# EAGLE board oao-001 (EAGLE 8.6.3)
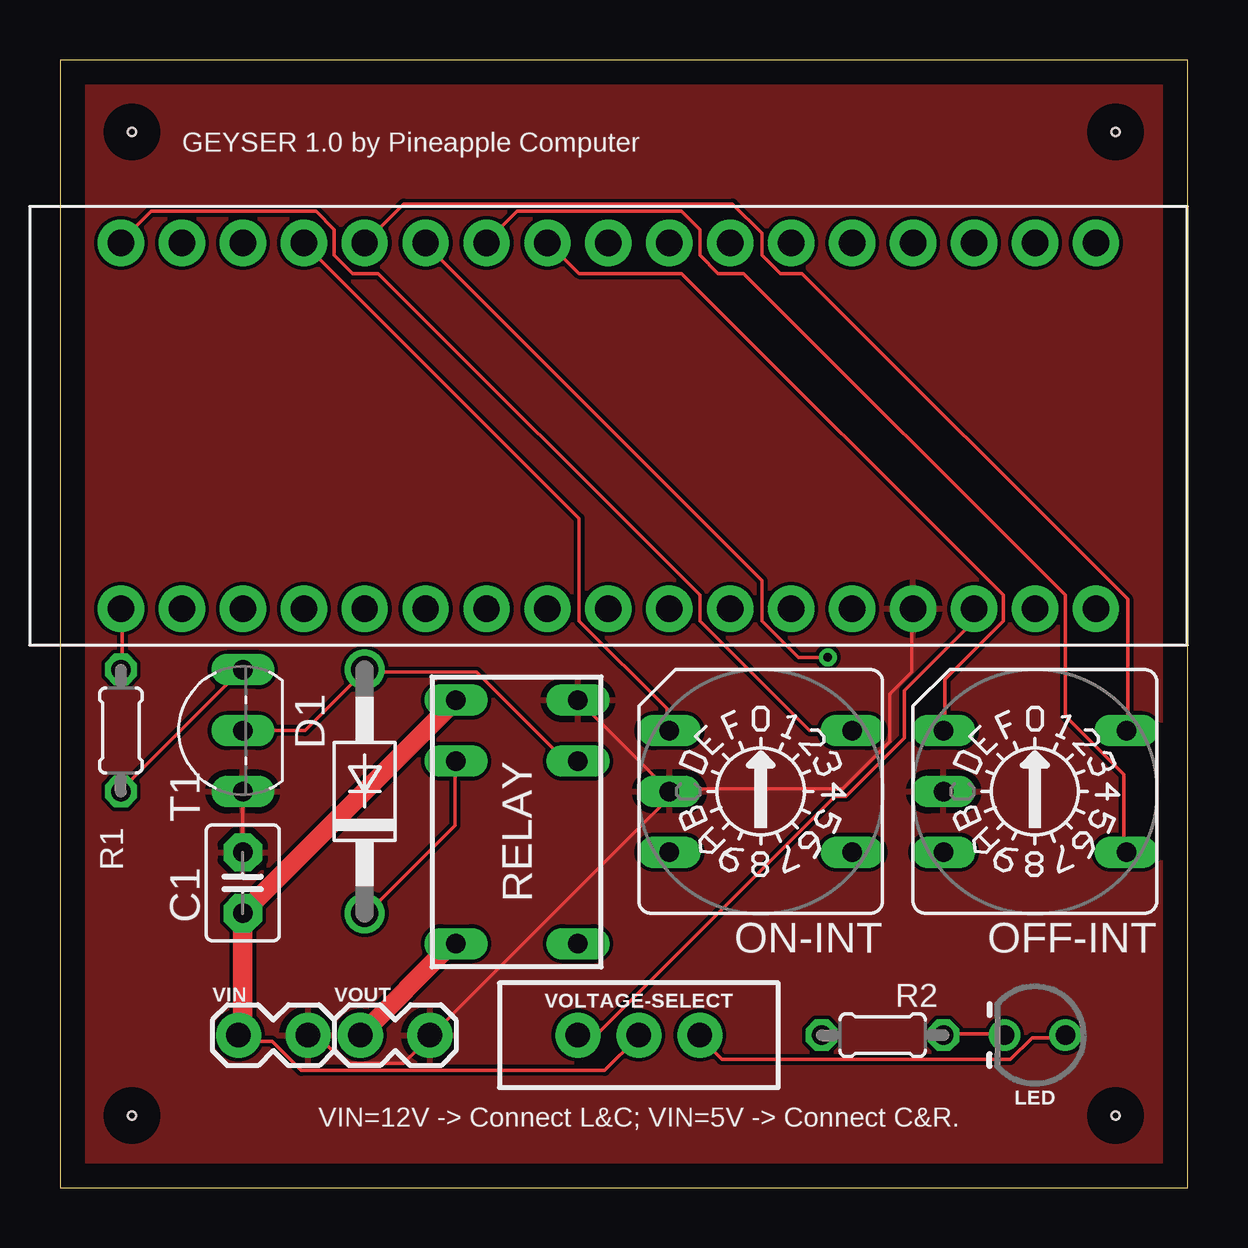
[diagram p0: board, top side]
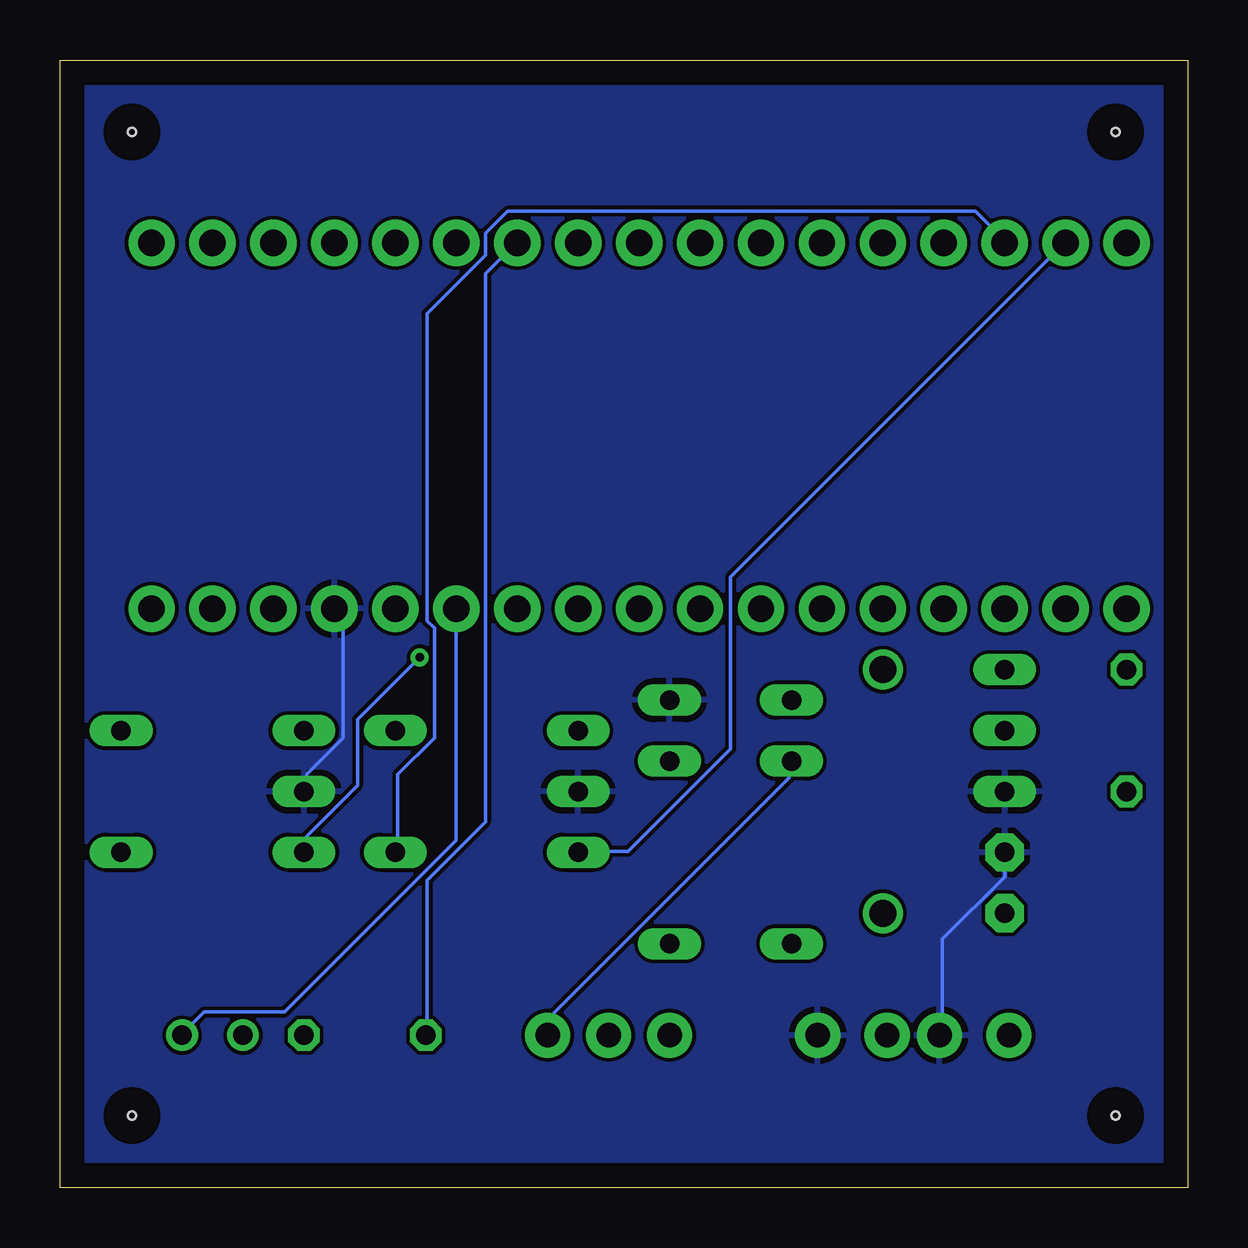
[diagram p1: board, bottom side, seen from below]

Size 47 x 47 mm. Coordinates in mm from the lower left corner, seen from the top.
Outline: 0,0 47,0 47,47 0,47 0,0
Copper layers (1*16): Top 0.035mm / dielectric 1.5mm / Bottom 0.035mm
Design rules "default": minimum track width 6mil, minimum drill 0.35mm, track to track 6mil, track to pad 6mil, pad to pad 6mil, via to via 6mil, smd to smd 6mil, copper to edge 40mil, drill to drill 6mil, minimum pad ring 10mil, minimum via ring 8mil, stop-mask expansion 4mil, vias tented up to drill 0mil, thermal gap 10mil
Holes 0.32 mm at 3,3 44,3 3,44 44,44

## Footprints (pad centres in the part's own frame; a part is rotated, then mirrored left to right if it is on the bottom)
C2.5-3 = drill 0.813 pad 1.6 octagon: 1 -1.27,0; 2 1.27,0
DO41-10 = drill 1.118: A 5.08,0; C -5.08,0
LED_3MM-NS = drill 0.813: A -1.27,0; K 1.27,0
A1353HEX = drill 0.813 long: 1 3.81,-2.54; 2 -3.81,2.54; 4 3.81,2.54; 8 -3.81,-2.54; C 3.81,0
0204/5 = drill 0.813 octagon: 1 -2.54,0; 2 2.54,0
G5V1 = drill 0.813 long: 1 -5.08,-2.54; 2 -2.54,-2.54; 5 5.08,-2.54; 6 5.08,2.54; 9 -2.54,2.54; 10 -5.08,2.54
TO92-ECB = drill 0.813 long: B 2.54,0; C 0,0; E -2.54,0
ARDUINOMICRO = drill 1.1 pad 1.93: P$1 -20.32,7.62; P$2 -17.78,7.62; P$3 -15.24,7.62; P$4 -12.7,7.62; P$5 -10.16,7.62; P$6 -7.62,7.62; P$7 -5.08,7.62; P$8 -2.54,7.62; P$9 0,7.62; P$10 2.54,7.62; P$11 5.08,7.62; P$12 12.7,-7.62; P$13 10.16,-7.62; P$14 12.7,7.62; P$15 15.24,7.62; P$16 17.78,7.62; P$17 20.32,7.62; P$18 20.32,-7.62; P$19 17.78,-7.62; P$20 15.24,-7.62; P$21 7.62,7.62; P$22 10.16,7.62; P$23 7.62,-7.62; P$24 5.08,-7.62; P$25 2.54,-7.62; P$26 0,-7.62; P$27 -2.54,-7.62; P$28 -5.08,-7.62; P$29 -7.62,-7.62; P$30 -10.16,-7.62; P$31 -12.7,-7.62; P$32 -15.24,-7.62; P$33 -17.78,-7.62; P$34 -20.32,-7.62
1X02_LOCK = drill 1.016 pad 1.88: 1 -0.178,0; 2 2.718,0
SWITCH_SPDT_PTH_11.6X4.0MM = drill 1.016 pad 1.88: 1 0,2.54; 2 0,0; 3 0,-2.54

## Placement (x,y rotation side)
C1  [C2.5-3]  7.62,12.7 90 top
D1  1N4004  [DO41-10]  12.7,16.51 90 top
LED  [LED_3MM-NS]  40.64,6.35 180 top
OFF-INT  [A1353HEX]  40.64,16.51 180 top
ON-INT  [A1353HEX]  29.21,16.51 180 top
R1  3.3k  [0204/5]  2.54,19.05 90 top
R2  220  [0204/5]  34.29,6.35 0 top
RELAY  G5V1  [G5V1]  19.05,15.24 270 top
T1  2SC1815  [TO92-ECB]  7.62,19.05 90 top
U$1  ARDUINOMICRO  [ARDUINOMICRO]  22.86,31.75 0 top
VIN  [1X02_LOCK]  7.62,6.35 0 top
VOLTAGE-SELECT  12V-5V  [SWITCH_SPDT_PTH_11.6X4.0MM]  24.13,6.35 270 top
VOUT  [1X02_LOCK]  12.7,6.35 0 top

## Library data of the parts
C1 = capacitor-wima
D1 = diode
LED = SparkFun-LED
OFF-INT ON-INT = switch-dil; OC_FARNELL: unknown; OC_NEWARK: unknown
R1 R2 = resistor
RELAY = relay; MPN: G5V-1-DC24; OC_FARNELL: 9949593; OC_NEWARK: 36M6377
T1 = transistor
U$1 = adafruit
VIN VOUT = SparkFun-Connectors
VOLTAGE-SELECT = SparkFun-Switches; PROD_ID: SWCH-08261; SF_SKU: COM-00102

## Nets
GND: C1.2 OFF-INT.C ON-INT.C RELAY.10 T1.E U$1.P$12 VIN.2 VOUT.2
LEDDRIVE: R2.1 U$1.P$11
N$1: RELAY.5 VOUT.1
N$2: OFF-INT.8 U$1.P$5
N$3: R1.1 T1.B
N$4: D1.A RELAY.9 T1.C
N$5: OFF-INT.4 U$1.P$6
N$6: OFF-INT.2 U$1.P$7
N$7: ON-INT.8 U$1.P$1
N$8: ON-INT.4 U$1.P$2
N$9: ON-INT.2 U$1.P$3
N$10: ON-INT.1 U$1.P$4
N$11: OFF-INT.1 U$1.P$8
N$14: LED.K R2.2
RELAYDRIVE: R1.2 U$1.P$34
V12: U$1.P$20 VOLTAGE-SELECT.3
VCC: D1.C LED.A RELAY.2 U$1.P$23 VOLTAGE-SELECT.1
VDD: C1.1 RELAY.1 VIN.1 VOLTAGE-SELECT.2

## Tracks (layer width: path | path; a pad name or v marks a point on that pad's centre or on a via)
GND
  Top 0.152: ON-INT.C RELAY.10 | C1.2 T1.E | VIN.2 10.36,6.25 10.82,6.25 11.89,5.18 14.33,5.18 15.39,6.25 VOUT.2 15.54,6.4 25.3,16.15 25.3,16.46 ON-INT.C | U$1.P$12 35.51,24.08 35.51,21.49 34.59,20.57 34.59,18.59 32.61,16.61 25.45,16.61 ON-INT.C
  Bottom 0.152: U$1.P$12 35.2,23.77 35.2,18.75 36.73,17.22 36.73,16.61 OFF-INT.C | C1.2 7.62,12.95 10.21,10.36 10.21,6.4 VIN.2
  pour Bottom: 0,0 46.99,0 46.99,46.99 0,46.99
  pour Top: 0,0 46.99,0 46.99,46.99 0,46.99
LEDDRIVE
  Bottom 0.152: R2.1 31.7,6.4 31.7,12.8 29.26,15.24 29.26,38.1 28.04,39.32 U$1.P$11
N$1
  Top 0.813: RELAY.5 16.33,10.16 VOUT.1
N$2
  Top 0.152: U$1.P$5 14.33,41 28.04,41 29.26,39.78 29.26,38.86 30.02,38.1 30.94,38.1 44.5,24.54 44.5,19.05 OFF-INT.8
N$3
  Top 0.152: R1.1 2.59,16.61 7.62,21.64 T1.B
N$4
  Top 0.152: RELAY.9 21.49,17.83 21.03,17.83 17.37,21.49 12.8,21.49 D1.A 12.65,21.49 10.21,19.05 T1.C
N$5  (via drill 0.35)
  Top 0.152: v32,22.1 30.79,22.1 29.26,23.62 29.26,25.3 15.24,39.32 U$1.P$6
  Bottom 0.152: v32,22.1 34.59,19.51 34.59,16.76 36.73,14.63 36.73,14.02 OFF-INT.4
N$6
  Top 0.152: OFF-INT.2 44.35,14.02 44.35,17.22 41.91,19.66 41.91,24.69 28.5,38.1 27.43,38.1 26.67,38.86 26.67,39.93 25.91,40.69 19.05,40.69 17.83,39.47 U$1.P$7
N$7
  Top 0.152: ON-INT.8 31.24,19.05 26.67,23.62 26.67,24.69 13.26,38.1 12.19,38.1 11.43,38.86 11.43,39.93 10.67,40.69 3.81,40.69 2.59,39.47 U$1.P$1
N$8
  Bottom 0.152: ON-INT.4 25.3,14.02 23.32,14.02 19.05,18.29 19.05,25.45 5.18,39.32 U$1.P$2
N$9
  Bottom 0.152: ON-INT.2 32.92,14.02 32.92,17.22 31.39,18.75 31.39,23.32 31.7,23.62 31.7,36.42 29.26,38.86 29.26,39.78 28.35,40.69 8.84,40.69 7.62,39.47 U$1.P$3
N$10
  Top 0.152: U$1.P$4 21.64,27.89 21.64,23.62 25.3,19.96 25.3,19.05 ON-INT.1
N$11
  Top 0.152: OFF-INT.1 36.88,19.05 36.88,21.18 39.32,23.62 39.32,24.69 25.91,38.1 21.64,38.1 20.42,39.32 U$1.P$8
N$14
  Top 0.152: R2.2 36.88,6.4 39.32,6.4 LED.K
RELAYDRIVE
  Top 0.152: R1.2 2.59,21.64 2.59,24.08 U$1.P$34
V12
  Top 0.152: U$1.P$20 38.1,23.62 35.2,20.73 35.2,18.75 32.77,16.31 32.31,16.31 22.4,6.4 21.64,6.4 VOLTAGE-SELECT.3
VCC
  Top 0.152: RELAY.2 16.46,17.68 16.46,15.09 12.8,11.43 D1.C | LED.A 41.91,6.25 40.54,6.25 39.62,5.33 27.58,5.33 26.67,6.25 VOLTAGE-SELECT.1
  Bottom 0.152: U$1.P$23 30.48,14.48 37.64,7.32 41,7.32 41.91,6.4 LED.A | VOLTAGE-SELECT.1 26.67,7.01 16.61,17.07 16.61,17.68 RELAY.2
VDD
  Top 0.152: 7.62,6.4 7.47,6.4 VIN.1 7.92,6.1 8.84,6.1 10.06,4.88 22.71,4.88 24.08,6.25 VOLTAGE-SELECT.2
  Top 0.813: RELAY.1 C1.1 7.62,6.4 7.62,6.35

## Text on the board
tNames: GEYSER 1.0 by Pineapple Computer | VIN=12V -> Connect L&C; VIN=5V -> Connect C&R.